# Altium PCB cf2loco.PcbDoc
Units mm, origin at the board's own origin, x right, y up, seen from the top; angles counter-clockwise.
Board outline 36 x 29 mm, 2 copper layers (Top Layer, Bottom Layer); 24 components, 23 nets, 136 pads, 9 vias.
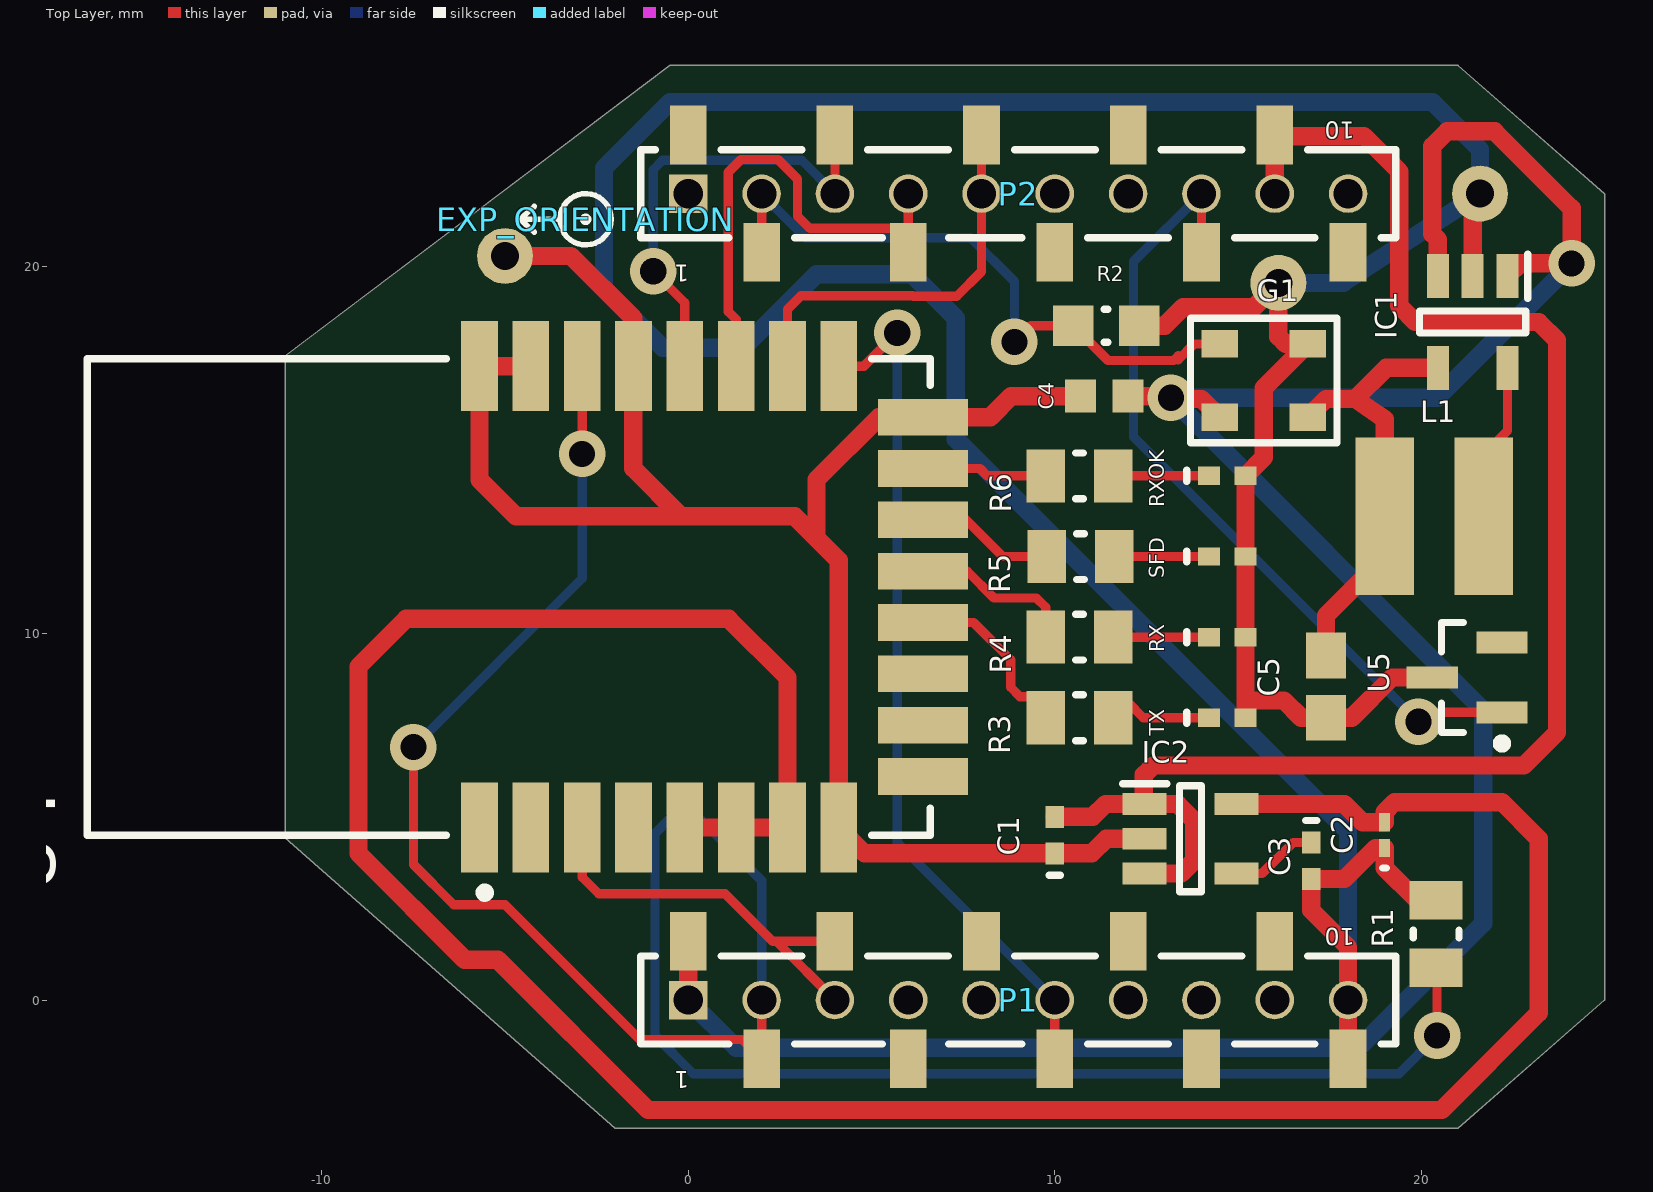
[diagram p0: Top Layer view]
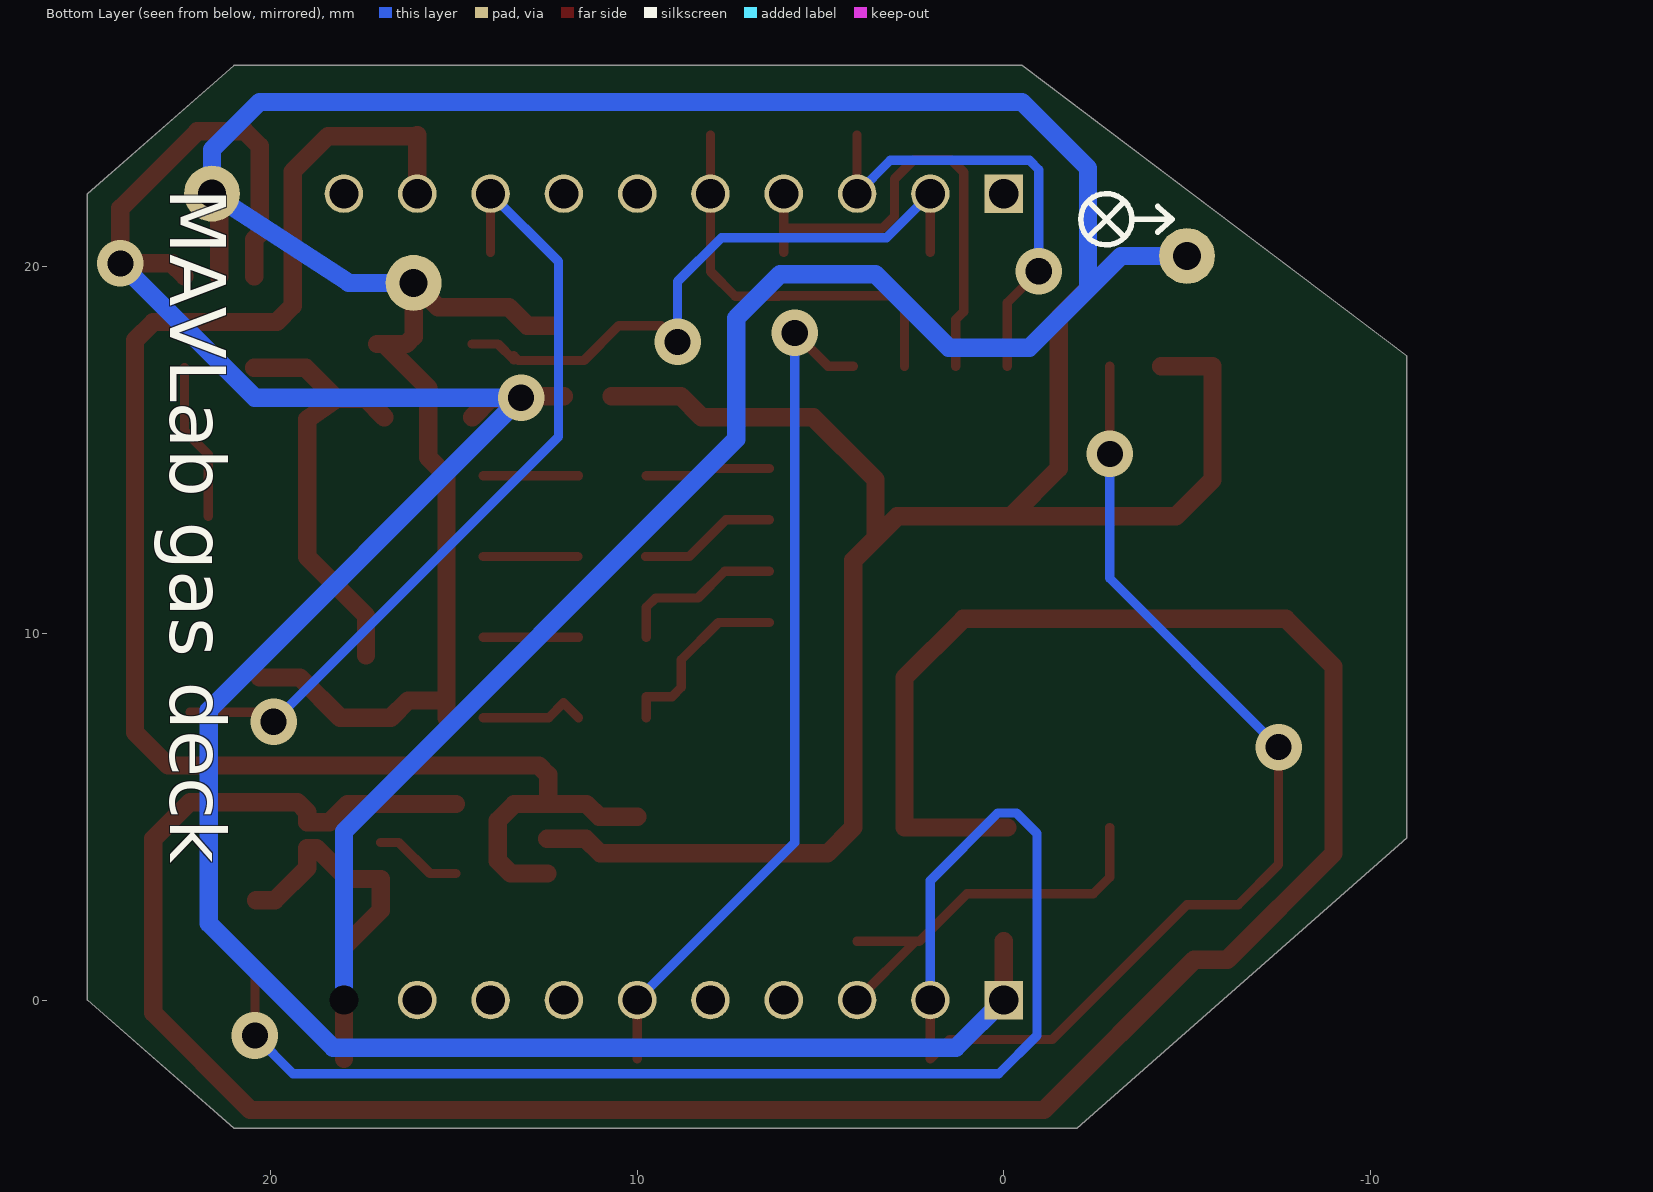
[diagram p1: Bottom Layer view, seen from below]

## Layer stack, top to bottom
Top Layer: signal copper 0.0356
Dielectric: dielectric 0.32, FR-4, Dk 4.8
Bottom Layer: signal copper 0.0356

## Board outline
-0.5,25.5 21,25.5 25,22 25,0 21,-3.5 -2,-3.5 -11,4.429 -11,17.571

## Design rules (kind name [scope] priority, off if disabled: settings)
Clearance [All] p1: gap=0.254
PolygonConnect [All] p1: connectstyle=Relief reliefconductorwidth=0.254 reliefentries=4 polygonreliefangle="90 Angle" airgapwidth=0.254
RoutingVias [All] p1: holewidth=0.711 width=1.27 viastyle="Through Hole" minholewidth=0.711 minwidth=1.27 maxholewidth=0.711 maxwidth=1.27
SMDNeckDown [All] p1: percent=50.000
SolderMaskExpansion [All] p1: expansion=0.102
Width [All] p1: maxlimit=0.254 minlimit=0.254 preferedwidth=0.254
28 further rules are at their usual default settings.

## Classes and differential pairs
component class cf2loco: C1 C2 C3 C4 C5 G1 IC1 IC2 L1 P1 P2 R1 R2 R3 R4 R5 R6 RX RXOK SFD TX U5

## Components (designator, comment, footprint, x,y, rotation, side; value= is the part's Value field where it differs from the comment)
C1 "Cap" 0402-A 10,4.5 r90 top
C2 "Cap" 0603 19,4.5 r90 top
C3 "Cap" 0402-A 17,3.8 r270 top
C4 "06036D475KAT2A" CAPC1608X90X35LL15T15 11.35,16.475 r0 top
C5 "06036D106MAT2A" CAPC1608X90X35ML15T15 17.4,8.55 r90 top
EXP_ORIENTATION "VAL**" EXP_ORIENTATION -2.8,21.3 r180 top
G1 "TGS8100" TGS8100 15.7,16.9 r180 top
IC1 "TPS62202DBVR" SOT95P280X145-5N 21.4,18.5 r270 top
IC2 "TPS73133DBVR" SOT95P280X145-5N 13.7,4.4 r0 top
L1 "744031100" WE-TPC-3816-S 20.35,13.2 r180 top
P1 "LEFT" CFHEADER#1 0.3,0.528 r90 top
P2 "RIGHT" CFHEADER#2 0.3,22.528 r90 top
R1 "CRCW0805100KFKEA" RESC2013X50X30NL20T20 20.4,1.8 r270 top
R2 "68K" RESC0603(1608)_M 11.4,18.4 r0 top
R3 "CRCW0805390RFKEA" RESC2013X50X30NL20T20 10.675,7.7 r180 top
R4 "CRCW0805390RFKEA" RESC2013X50X30NL20T20 10.675,9.9 r180 top
R5 "CRCW0805390RFKEA" RESC2013X50X30NL20T20 10.7,12.1 r180 top
R6 "CRCW0805390RFKEA" RESC2013X50X30NL20T20 10.675,14.3 r180 top
RX "LEDRX" 0402-A 14.7,9.9 r0 top
RXOK "LEDRXOK" 0402-A 14.7,14.3 r0 top
SFD "LEDSFD" 0402-A 14.7,12.1 r0 top
TX "LEDTX" 0402-A 14.7,7.7 r0 top
U4 "DWM1000" DECW-DWM1000-24_V -4.895,11 r90 top
U5 "DS28E05" SOT23 21.885,9.181 r90 top

## Footprints (in the part's own frame and the unit in brackets; to place one, negate y for a bottom-side part, rotate by r counter-clockwise, add the part's x,y. Pads: shape width x height; smd on the part's side, far side on the other; paste and mask are expansions set on the pad)
0402-A [mm] "Chip Inductor, Body 1.0x0.5mm, IPC High Density"
  rect 0.6x0.5 smd: 1(-0.5,0) 2(0.5,0)
  silkscreen extent -1.1,-0.15 -1.1,0.15, body extent -0.55,-0.3 0.55,0.3, height 0.55
0603 [mm] "Chip Inductor, Body 0.6x0.3mm, IPC High Density"
  rect 0.5x0.3 smd: 1(-0.35,0) 2(0.35,0)
  silkscreen extent -0.9,-0.05 -0.9,0.05, body extent -0.33,-0.18 0.33,0.18, height 0.55
CAPC1608X90X35LL15T15 [mm] "Chip Capacitor, 2-Leads, Body 1.60x0.81mm, IPC High Density"
  rect 0.85x0.9 smd: 1(-0.65,0) 2(0.65,0)
  body extent -0.88,-0.48 0.87,0.48, height 0.9
CAPC1608X90X35ML15T15 [mm] "Chip Capacitor, 2-Leads, Body 1.60x0.81mm, IPC Low Density"
  rect 1.25x1.1 smd: 1(-0.85,0) 2(0.85,0)
  body extent -0.88,-0.48 0.87,0.48, height 0.9
CFHEADER#1 [mm]
  round 1.05 smd: 1(-0.528,0.3) 2(-0.528,-1.7) 3(-0.528,-3.7) 4(-0.528,-5.7) 5(-0.528,-7.7) 6(-0.528,-9.7) 7(-0.528,-11.7) 8(-0.528,-13.7) 9(-0.528,-15.7) 10(-0.528,-17.7)
  rect 1.05x1.05 hole 0.8: 1(-0.528,0.3)
  rect 1.6x1 smd: 1(1.072,0.3) 2(-2.128,-1.7) 3(1.072,-3.7) 4(-2.128,-5.7) 5(1.072,-7.7) 6(-2.128,-9.7) 7(1.072,-11.7) 8(-2.128,-13.7) 9(1.072,-15.7) 10(-2.128,-17.7)
  round 1.05 hole 0.8: 2(-0.528,-1.7) 3(-0.528,-3.7) 4(-0.528,-5.7) 5(-0.528,-7.7) 6(-0.528,-9.7) 7(-0.528,-11.7) 8(-0.528,-13.7) 9(-0.528,-15.7)
  round 0 hole 0.8: 10(-0.528,-17.7)
  silkscreen extent -1.73,-19 0.67,1.6
CFHEADER#2 [mm]
  round 1.05 smd paste-1.05 mask-0.05: 1(-0.528,0.3) 2(-0.528,-1.7) 3(-0.528,-3.7) 4(-0.528,-5.7) 5(-0.528,-7.7) 6(-0.528,-9.7) 7(-0.528,-11.7) 8(-0.528,-13.7) 9(-0.528,-15.7) 10(-0.528,-17.7)
  rect 1.05x1.05 hole 0.8 paste-1.05 mask-1.05: 1(-0.528,0.3)
  rect 1.6x1 smd paste-0.03 mask+0: 1(1.072,0.3) 2(-2.128,-1.7) 3(1.072,-3.7) 4(-2.128,-5.7) 5(1.072,-7.7) 6(-2.128,-9.7) 7(1.072,-11.7) 8(-2.128,-13.7) 9(1.072,-15.7) 10(-2.128,-17.7)
  round 1.05 hole 0.8 paste-1.05 mask-1.05: 2(-0.528,-1.7) 3(-0.528,-3.7) 4(-0.528,-5.7) 5(-0.528,-7.7) 6(-0.528,-9.7) 7(-0.528,-11.7) 8(-0.528,-13.7) 9(-0.528,-15.7) 10(-0.528,-17.7)
  silkscreen extent -1.73,-19 0.67,1.6
DECW-DWM1000-24_V [mm] "SMD, 24-Leads, Body 23x13mm, Pitch 1.4mm"
  rect 2.45x1 smd: 1(-6.295,0.8) 2(-6.295,-0.6) 3(-6.295,-2) 4(-6.295,-3.4) 5(-6.295,-4.8) 6(-6.295,-6.2) 7(-6.295,-7.6) 8(-6.295,-9) 17(6.295,-9) 18(6.295,-7.6) 19(6.295,-6.2) 20(6.295,-4.8) 21(6.295,-3.4) 22(6.295,-2) 23(6.295,-0.6) 24(6.295,0.8)
  rect 1x2.45 smd: 9(-4.9,-11.295) 10(-3.5,-11.295) 11(-2.1,-11.295) 12(-0.7,-11.295) 13(0.7,-11.295) 14(2.1,-11.295) 15(3.5,-11.295) 16(4.9,-11.295)
  silkscreen extent -8.19,-11.5 6.5,11.5, body extent -6.5,-11.5 6.5,11.5, height 4
EXP_ORIENTATION [mm]
  silkscreen extent -0.7,-0.7 1.8,0.7
RESC0603(1608)_M [mm] "Chip Resistor, Body 1.6x0.8mm, IPC Low Density"
  rect 1.1x1.1 smd: 1(-0.9,0) 2(0.9,0)
  silkscreen extent -0.05,-0.45 0.05,0.45, body extent -0.85,-0.47 0.85,0.47, height 0.6
RESC2013X50X30NL20T20 [mm] "Chip Resistor, 2-Leads, Body 2.00x1.25mm, IPC Medium Density"
  rect 1.05x1.45 smd: 1(-0.925,0) 2(0.925,0)
  silkscreen extent -0.1,-0.63 0.1,0.62, body extent -1.1,-0.72 1.1,0.72, height 0.5
SOT23 [mm]
  rect 0.6x1.4 smd: 1(-1.331,-0.315) 2(0.569,-0.315) 3(-0.381,1.585)
  silkscreen extent -2.31,-0.44 1.12,1.33, body extent -1.88,-0.07 1.12,1.33, height 1.1
SOT95P280X145-5N [mm]
  rect 1.2x0.6 smd: 1(-1.25,0.95) 2(-1.25,0) 3(-1.25,-0.95) 4(1.25,-0.95) 5(1.25,0.95)
  silkscreen extent -1.85,-1.45 0.3,1.5, body extent -1.4,-1.45 1.4,1.45, height 1.45
TGS8100 [mm]
  rect 1x0.75 smd: 1(-1.2,-1) 2(1.2,-1) 3(1.2,1) 4(-1.2,1)
  silkscreen extent -2,-1.7 2,1.7
WE-TPC-3816-S [mm] "SMD Inductor, 2-Leads, Body 3.8 x 3.8 mm"
  rect 1.6x4.3 smd: 1(-1.35,0) 2(1.35,0)
  body extent -1.9,-1.9 1.9,1.9, height 1.64

## Part data
C1 C2 C3: "Capacitor"
C4: library part CMP-2006-04481-1
C5: library part CMP-2006-04476-1
EXP_ORIENTATION: library part EXP_ORIENTATION
IC1 IC2: "Integrated Circuit"
L1: library part CMP-0227-00349-1, "SMD Shielded Tiny Power Inductor WE-TPC, L = 10.0 µH"
P1 P2: library part "Header 10", "Header, 10-Pin"
R1: library part CMP-2001-04899-1
R2: library part CMP-1012-00717-1, "68K 0.1W 1% 0603 (1608 Metric)  SMD"
R3 R4 R5 R6: library part CMP-2001-03859-1
RX RXOK SFD TX: library part LED2, "Typical RED, GREEN, YELLOW, AMBER GaAs LED"
U4: "Mod Ieee802.15.4-2011 Uwb Txrx"

## Free pads (board coordinates)
  round 1.524 hole 0.762: 0(-5,20.3) 1(21.6,22) 2(16.1,19.565)

## Via types
v1: diameter 1.27, hole 0.711, Top Layer to Bottom Layer, 9 vias

## Nets (pads, with @x,y where several pads share a name; then routed paths per layer and width w, separated by ;. In a path a pad name is that pad's centre, name@x,y a point inside that pad or via, vN(x,y) a via of type N, cw(c..) or ccw(c..) an arc to the next point about the centre after c; other vN are vias at no path point)
3V: C4.2 G1.3 IC1.1 IC1.3 P1.1 | length 70.5
  Top Layer w0.5: P1.1@0,0 P1.1@0,1.6 ; C4.2 13.139,16.475 v1@13.214,16.4 ; v1(13.165,16.431) 13.196,16.4 v1@13.214,16.4 ; G1.3 14,16.4 v1@13.214,16.4 ; IC1.3 20.45,20.75 20.3,20.9 20.3,23.3 20.7,23.7 22,23.7 24.1,21.6 v1(24.1,20.1) 22.7,20.1 IC1.1
  Bottom Layer w0.5: P1.1@0,0 1.3,-1.3 18.3,-1.3 21.686,2.087 21.686,7.909 v1(13.165,16.431) 20.431,16.431 v1(24.1,20.1) 24.3,20.1 v1@24.4,20
A1: G1.2 P2.2 R2.1 | length 17.7
  Top Layer w0.254: P2.2@2,20.4 P2.2@2,22 ; v1(8.898,17.955) 9.343,18.4 R2.1 11.453,17.447 13.241,17.447 13.368,17.574 13.368,17.468 13.8,17.9 G1.2
  Bottom Layer w0.254: P2.2@2,22 3.2,20.8 7.7,20.8 8.898,19.602 v1(8.898,17.955)
CS: P1.6 U4.17 | length 23.6
  Top Layer w0.254: U4.17 4.795,17.295 v1(5.7,18.2) ; P1.6@10,-1.6 P1.6@10,0
  Bottom Layer w0.254: v1(5.7,18.2) 5.7,4.3 P1.6@10,0
GND: C1.1 C2.1 C3.2 C4.1 C5.1 G1.1 IC1.2 IC2.2 P1.10 pad.0 pad.1 pad.2 R1.1 R2.2 RX.2 RXOK.2 SFD.2 TX.2 U4.8 U4.16 U4.21 U4.23 U4.24 U5.3 | length 160.9
  Top Layer w0.254: U4.21 U4.21@-1.495,17.3
  Top Layer w0.5: pad.0 -3.2,20.3 -1.5,18.6 -1.5,14.5 -0.2,13.2 ; U4.23 U4.24 -5.695,14.195 -4.7,13.2 2.9,13.2 4.105,11.995 U4.8 4.81,4 C1.1 11.006,4 11.406,4.4 IC2.2 ; 3.5,12.6 3.5,14.2 5.2,15.9 U4.16 8.237,15.9 8.812,16.475 C4.1 ; R2.2 13,18.4 13.5,18.9 15.435,18.9 pad.2 16.1,18.1 16.3,17.9 G1.1@17.1,17.9 ; TX.2 15.2,8.171 ; G1.1 15.7,16.7 15.7,14.8 RXOK.2 SFD.2 RX.2 15.2,8.171 ; P1.10@18,-1.6 18,1.445 17,2.445 C3.2 17.9,3.3 18.75,4.15 C2.1 19,3.604 19.879,2.725 R1.1 ; U5.3 19.2,8.8 18.1,7.7 C5.1 16.724,7.7 16.254,8.171 15.2,8.171 ; IC1.2 21.4,21.7 pad.1@21.9,22.2
  Bottom Layer w0.5: pad.0 -3.2,20.3 -0.7,17.8 1.5,17.8 3.5,19.8 6.1,19.8 7.3,18.6 7.3,15.3 18,4.6 18,0 ; -2.3,19.4 -2.3,22.7 -0.5,24.5 20.3,24.5 21.6,23.2 pad.1 17.865,19.565 pad.2
IRQ: P1.2 R1.2 U4.22 | length 65.5
  Top Layer w0.254: v1(-7.5,6.9) -7.5,3.7 -6.4,2.6 -5,2.6 -1.325,-1.075 1.475,-1.075 2,-1.6 P1.2@2,0 ; v1@-2.9,14.4 v1@-2.895,14.405 ; v1(-2.895,14.9) U4.22 ; R1.2 20.429,0.846 v1(20.429,-0.968)
  Bottom Layer w0.254: v1(-7.5,6.9) -2.895,11.505 v1(-2.895,14.9) ; P1.2@2,0 2,3.263 0.16,5.103 -0.348,5.103 -0.907,4.544 -0.907,-0.968 0.135,-2.009 19.388,-2.009 v1(20.429,-0.968)
MISO: P2.4 U4.19 | length 13.4
  Top Layer w0.254: U4.19 1.305,18.565 1.094,18.776 1.094,22.588 1.439,22.933 2.446,22.933 2.979,22.4 2.979,21.384 3.31,21.054 P2.4@6,21.054 ; P2.4@6,20.4 P2.4@6,21.054 ; P2.4@6,22 P2.4@6,21.054
MOSI: P2.5 U4.18 | length 11
  Top Layer w0.254: U4.18 2.705,18.844 3.077,19.216 6.121,19.216 6.137,19.2 7.323,19.2 8,19.877 P2.5@8,23.6
NetC3_1: C3.1 IC2.4 | length 2.4
  Top Layer w0.254: IC2.4 15.654,3.45 16.504,4.3 C3.1
NetIC1_5: IC1.5 L1.1 | length 4.3
  Top Layer w0.254: L1.1 21.7,14.882 22.35,15.532 IC1.5
NetR3_1: R3.1 TX.1 | length 2.9
  Top Layer w0.25: 12.416,7.7 TX.1
  Top Layer w0.254: R3.1 12.008,8.108 12.416,7.7
NetR3_2: R3.2 U4.12 | length 5.2
  Top Layer w0.254: U4.12 7.78,10.3 8.796,9.284 8.796,8.532 9.05,8.278 9.75,8.278 R3.2
NetR4_1: R4.1 RX.1 | length 2.6
  Top Layer w0.254: R4.1 RX.1
NetR4_2: R4.2 U4.13 | length 4.6
  Top Layer w0.254: U4.13 7.609,11.7 8.339,10.97 9.496,10.97 9.75,10.716 R4.2
NetR5_1: R5.1 SFD.1 | length 2.6
  Top Layer w0.254: R5.1 SFD.1
NetR5_2: R5.2 U4.14 | length 3.8
  Top Layer w0.254: U4.14 7.577,13.1 8.577,12.1 R5.2
NetR6_1: R6.1 RXOK.1 | length 2.6
  Top Layer w0.254: R6.1 RXOK.1
NetR6_2: R6.2 U4.15 | length 3.4
  Top Layer w0.254: U4.15 7.958,14.5 8.158,14.3 R6.2
OW: P2.8 U5.1 | length 22.4
  Top Layer w0.254: P2.8@14,20.4 P2.8@14,22 ; v1(19.921,7.592) 20.179,7.85 U5.1
  Bottom Layer w0.254: P2.8@14,22 12.149,20.149 12.149,15.364 v1(19.921,7.592)
RESET: P1.3 U4.3 | length 11.2
  Top Layer w0.254: U4.3 -2.895,3.35 -2.445,2.9 1,2.9 2.3,1.6 P1.3@4,1.6 ; 2.4,1.6 P1.3@4,0
SCK: P2.3 U4.20 | length 12.8
  Top Layer w0.254: v1(-0.957,19.883) -0.095,19.022 U4.20 ; P2.3@4,22 P2.3@4,23.6
  Bottom Layer w0.254: v1(-0.957,19.883) -0.957,22.654 -0.703,22.908 3.092,22.908 P2.3@4,22
VCC: C2.2 IC2.5 U4.5 U4.6 U4.7 | length 75.1
  Top Layer w0.5: U4.5 U4.6 U4.7 2.705,8.795 1.1,10.4 -7.7,10.4 -9,9.1 -9,4 -6.1,1.1 -5.2,1.1 -1.1,-3 20.556,-3 23.2,-0.356 23.2,4.4 22.2,5.4 19.272,5.4 19,5.128 C2.2 18.396,4.85 17.896,5.35 IC2.5
VCOM: C1.2 IC2.1 IC2.3 P2.9 | length 44
  Top Layer w0.5: C1.2 11.031,5 11.381,5.35 IC2.1@12.428,5.35 ; IC2.3 13.45,3.45 13.8,3.8 13.8,4.9 13.35,5.35 IC2.1 IC2.1@12.428,5.35 ; P2.9@16,22 P2.9@16,23.568 ; P2.9@16,23.6 P2.9@16,23.568 ; 23.7,9.7 23.7,18 23.2,18.5 19.833,18.5 19.4,18.933 19.4,22.6 18.432,23.568 P2.9@16,23.568 ; 23.7,9.985 23.7,7.3 22.8,6.4 12.684,6.4 12.428,6.144 IC2.1@12.428,5.35
VO: C5.2 G1.4 IC1.4 L1.2 | length 12.2
  Top Layer w0.5: G1.4 17.4,16.4 18.194,16.4 ; C5.2 17.4,10.487 19,12.087 L1.2 19,15.848 18.194,16.4 ; IC1.4 19.044,17.25 18.194,16.4
pads on no net: P1.4 P1.5 P1.7 P1.8 P1.9 P2.1 P2.6 P2.7 P2.10 U4.1 U4.2 U4.4 U4.9 U4.10 U4.11 U5.2

## Silkscreen, mask and mechanical layers (free items; w line width, h text height)
Bottom Overlay:
  text "MAVLab gas deck" at 22.738,22.146 h1.52 r90

## Text inside footprints (layer, text, board x,y; h text height)
P1: Top Overlay "10" at 18.183,2.128 h0.8 r180; Top Overlay "1" at 0.029,-1.779 h0.8 r180
P2: Top Overlay "10" at 18.183,24.128 h0.8 r180; Top Overlay "1" at 0.029,20.221 h0.8 r180